# Altium PCB BPS_PCB_v1-0.PcbDoc
Units mil, origin at the board's own origin, x right, y up, seen from the top; angles counter-clockwise.
Board outline 6102.36 x 2834.65 mil, 2 copper layers (Top Layer, Bottom Layer); 29 components, 13 nets, 96 pads, 0 vias.
Unrouted connection lines stored in the file: 82.
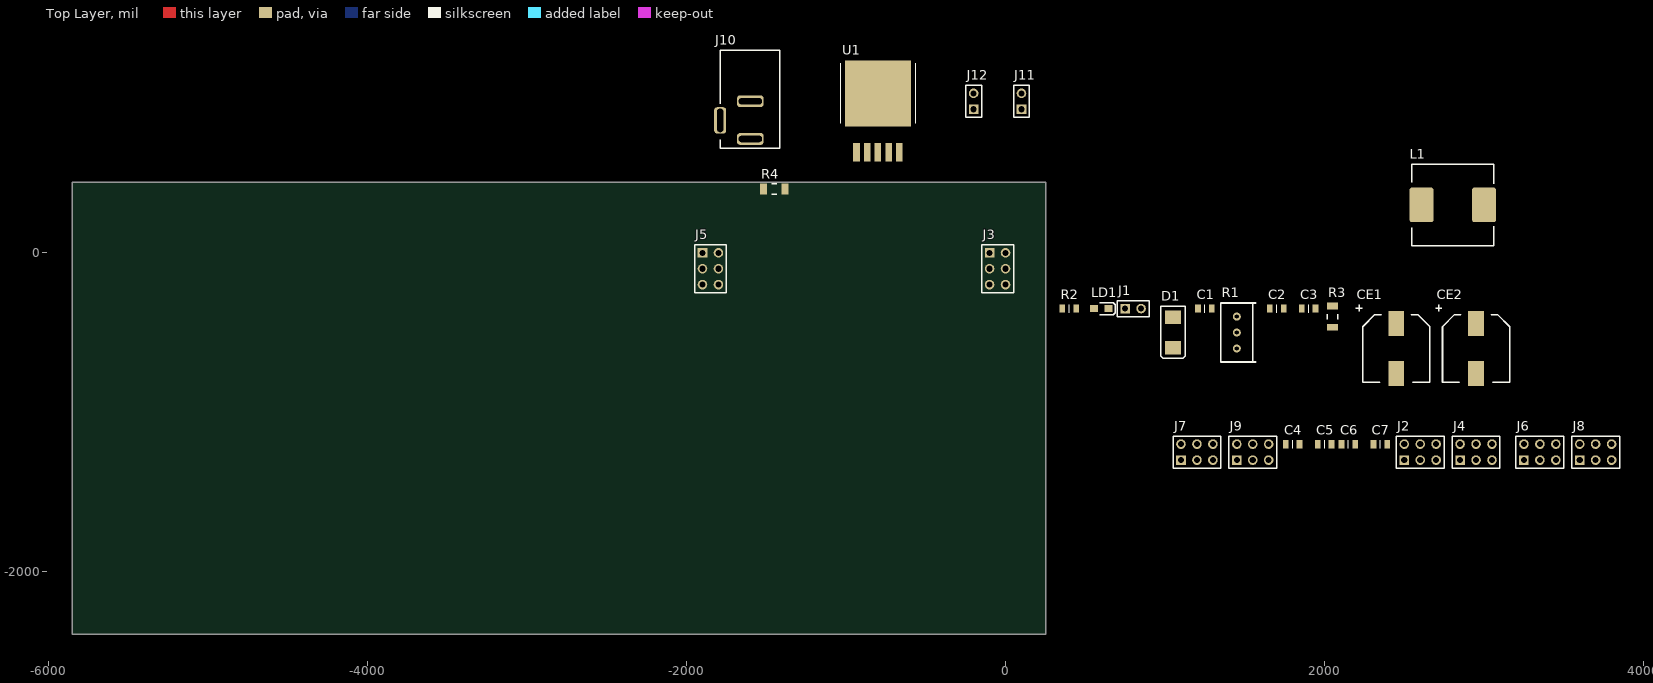
[diagram p0: Top Layer view]
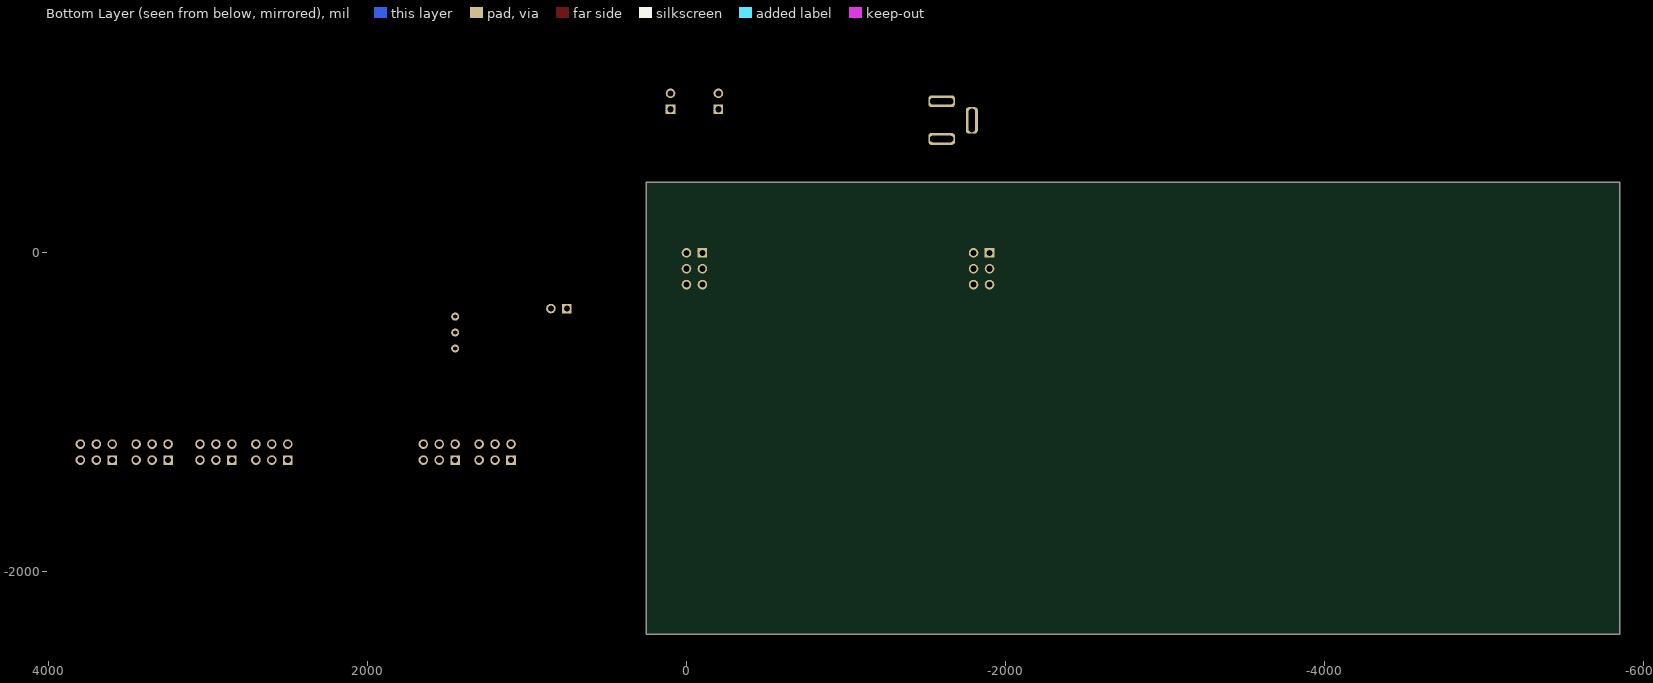
[diagram p1: Bottom Layer view, seen from below]

## Layer stack, top to bottom
Top Solder: solder mask 0.4, Solder Resist, Dk 3.5
Top Layer: signal copper 1.4
Dielectric 1: dielectric 12.6, FR-4, Dk 4.8
Bottom Layer: signal copper 1.4
Bottom Solder: solder mask 0.4, Solder Resist, Dk 3.5

## Board outline
-5850.39,-2391.34 251.97,-2391.34 251.97,443.31 -5850.39,443.31

## Design rules (kind name [scope] priority, off if disabled: settings)
Clearance [All] p1: gap=10 ignorepadtopadclearanceinfootprint=FALSE except(0: Arc-Hole Track-Hole SMDPad-Hole THPad-Hole Via-Hole Fill-Hole Poly-Hole Region-Hole Text-Hole)
PolygonConnect [All] p1: connectstyle=Relief reliefconductorwidth=10 reliefentries=4 polygonreliefangle="90 Angle" airgapwidth=10
RoomDefinition BPS_PowerSupply_v1-0 [InComponentClass('BPS_PowerSupply_v1-0')] p1: confinementstyle=ConfineIn formatcopy=TRUE lockcomponents=FALSE outline -6800,-3350 3800,-3350 3800,1350 -6800,1350
RoomDefinition BPS_PowerOutput_v1-0 [InComponentClass('BPS_PowerOutput_v1-0')] p2: confinementstyle=ConfineIn formatcopy=TRUE lockcomponents=FALSE outline -6850,-3300 3950,-3300 3950,1300 -6850,1300
RoomDefinition BPS_PowerInput_v1-0 [InComponentClass('BPS_PowerInput_v1-0')] p3: confinementstyle=ConfineIn formatcopy=TRUE lockcomponents=FALSE outline -6900,-3250 1450,-3250 1450,1450 -6900,1450
RoutingVias [All] p1: holewidth=28 width=50 viastyle="Through Hole" minholewidth=28 minwidth=50 maxholewidth=28 maxwidth=50
SolderMaskExpansion [All] p1: expansion=4 istentingtop=FALSE
Width [All] p1: maxlimit=10 minlimit=10 preferedwidth=10
30 further rules are at their usual default settings.

## Classes and differential pairs
component class BPS_PowerSupply_v1-0: C1 C2 C3 CE1 CE2 D1 J1 L1 LD1 R1 R2 R3 U1
component class BPS_PowerOutput_v1-0: C4 C5 C6 C7 J2 J3 J4 J5 J6 J7 J8 J9
component class BPS_PowerInput_v1-0: J10 J11 J12 R4

## Components (designator, comment, footprint, x,y, rotation, side; value= is the part's Value field where it differs from the comment)
C1 "WCAP-CSGP (0805)" Cap0805 1250,-350 r0 top value=100nF
C2 "WCAP-CSGP (0805)" Cap0805 1700,-350 r0 top value=3.3nF
C3 "WCAP-CSGP (0805)" Cap0805 1900,-350 r0 top value=100nF
C4 "WCAP-CSGP (0805)" Cap0805 1800,-1200 r0 top value=100nF
C5 "WCAP-CSGP (0805)" Cap0805 2000,-1200 r0 top value=100nF
C6 "WCAP-CSGP (0805)" Cap0805 2150,-1200 r0 top value=100nF
C7 "WCAP-CSGP (0805)" Cap0805 2350,-1200 r0 top value=100nF
CE1 "50V 100uF" 10.0dia(10.0) 2450,-600 r0 top value=100uF
CE2 "35V 220uF" 10.0dia(10.0) 2950,-600 r0 top value=220uF
D1 "SS34" DO-214AA 1050,-500 r90 top
J1 "22-28-4023" CONSIL02STRMALE_100_100 800,-350 r0 top
J2 "10-89-7062" CONDIL06STRMALE_100_100 2600,-1250 r0 top
J3 "10-89-7062" CONDIL06STRMALE_100_100 -50,-100 r270 top
J4 "10-89-7062" CONDIL06STRMALE_100_100 2950,-1250 r0 top
J5 "10-89-7062" CONDIL06STRMALE_100_100 -1850,-100 r270 top
J6 "10-89-7062" CONDIL06STRMALE_100_100 3350,-1250 r0 top
J7 "10-89-7062" CONDIL06STRMALE_100_100 1200,-1250 r0 top
J8 "10-89-7062" CONDIL06STRMALE_100_100 3700,-1250 r0 top
J9 "10-89-7062" CONDIL06STRMALE_100_100 1550,-1250 r0 top
J10 "163-179PH-EX" PowerJack_2.1_5.5 -1600,1253.15 r180 top
J11 "22-28-4023" CONSIL02STRMALE_100_100 100,950 r90 top
J12 "22-28-4023" CONSIL02STRMALE_100_100 -200,950 r90 top
L1 "DR127" DR127 2804.13,300 r0 top value=47.0uH
LD1 "APT2012SGC" LED0805 600,-350 r0 top
R1 "3296W" 3296W 1450,-500 r0 top value=10k
R2 "Chip Resistor" RES0805 400,-350 r0 top value=510R
R3 "Chip Resistor" RES1206 2050,-400 r90 top value=5.1k
R4 "Chip Resistor" RES1206 -1450,400 r180 top value=0R
U1 "LM2596SX-ADJ/NOPB" TO-263-5 -800,872.05 r90 top

## Footprints (in the part's own frame and the unit in brackets; to place one, negate y for a bottom-side part, rotate by r counter-clockwise, add the part's x,y. Pads: shape width x height; smd on the part's side, far side on the other; paste and mask are expansions set on the pad)
10.0dia(10.0) [mm] "Capacitor Eletrolytic (D=10,P=10)"
  rect 2.5x4 smd: 1(0,4) 2(0,-4)
  silkscreen extent -6.44,-5.4 5.35,6.95, body extent -5.25,-6 5.25,6, height 10.5
3296W [mil] "Trimmer Resistors - Through Hole 3/8\" Sealed Vertical Adjust"
  round 50 hole 26: 1(0,100) 2(0,0) 3(0,-100)
  silkscreen extent -100,-185 120,185, body extent -95,-189 95,189, height 458
Cap0805 [mm] "Multilayer Ceramic Capacitors MLCC - SMD/SMT"
  rect 0.9x1.3 smd mask+0.05: 1(-1.1,0) 2(1.1,0)
  silkscreen extent 0,-0.64 0,0.64, body extent -1,-0.62 1,0.63, height 0.78
CONDIL06STRMALE_100_100 [mil] "Headers & Wire Housings 6CKT"
  rect 60x60 hole 38: 1(-100,-50)
  round 60 hole 38: 2(-100,50) 3(0,-50) 4(0,50) 5(100,-50) 6(100,50)
  silkscreen extent -150,-100 150,100, body extent -150,-96 150,96, height 363
CONSIL02STRMALE_100_100 [mil] "Headers & Wire Housings 2CKT"
  rect 60x60 hole 38: 1(-50,0)
  round 60 hole 38: 2(50,0)
  silkscreen extent -100,-50 100,50, body extent -100,-50 100,50, height 363
DO-214AA [mil] "Surface Mount General Rectifier"
  rect 85x100 smd: A(96,0) K(-96,0)
  silkscreen extent -161,-78 165,78, body extent -108,-77 108,77, height 96
DR127 [mm] "High power density, high efficiency, low profile shielded  drum core power inductors"
  rrect20% 3.85x5.5 smd mask+0.203: 1(-4.975,0) 2(4.975,0)
  silkscreen extent -6.5,-6.5 6.5,6.5, body extent -6.25,-6.25 6.25,6.25, height 8
LED0805 [mm] "Chip Led, Body 2.0x1.25mm"
  rect 1.25x1.1 smd mask+0.05: A(-1.175,0) K(1.175,0)
  silkscreen extent -0.25,-0.97 2.26,0.97, body extent -1,-0.62 1,0.63, height 1.12
PowerJack_2.1_5.5 [mm] "DC Power Connectors Power Jack/Connector 2.1mm x 5.5mm"
  rrect50% 4.2x1.9 hole 3.7 slot 1 at 90 deg: 1(0,13.7) 2(0,7.7)
  rrect50% 1.9x4.2 hole 3.7 slot 1 at 0 deg: 3(4.8,10.75)
  silkscreen extent -4.7,-0.4 4.8,15.2, body extent -4.5,-0.3 4.9,14, height 11.1
RES0805 [mm] "Chip Resistor, Body 2.0x1.25mm"
  rect 0.9x1.3 smd mask+0.05: 1(-1.1,0) 2(1.1,0)
  silkscreen extent 0,-0.64 0,0.64, body extent -1.01,-0.63 0.99,0.62, height 0.5
RES1206 [mm] "Chip Resistor, Body 3.2x1.6mm"
  rect 1.1x1.7 smd mask+0.051: 1(-1.7,0) 2(1.7,0)
  silkscreen extent -0.4,-0.8 0.4,0.8, body extent -1.55,-0.77 1.55,0.78, height 0.55
TO-263-5 [mm] "D-PAK/TO-263-5; 5 Leads; Body 14.4 (inc. leads) x 10.4 mm (LxW max)"
  rect 2.95x1.05 smd: 1(-6.15,3.41) 2(-6.15,1.705) 3(-6.15,0) 4(-6.15,-1.705) 5(-6.15,-3.41)
  rect 10.5x10.5 smd: 6(3.25,0)
  silkscreen extent -1.5,-6 8,5.9, body extent -6.73,-5.08 7.29,5.08, height 4.56

## Part data
C1 C2 C3 C4 C5 C6 C7: "Surface Mount Multilayer Ceramic Chip Capacitors  for Commercial Applications", Manufacturer1=Wurth, PartNumber1=EMPTY, Tolerance=20%, Voltage=50V, LatestRevisionDate=19-Jun-2016, PackageDescription="CAP0805;2 Leads", PackageReference=CAP0805, Published=19-Jun-2016, Publisher="Lucas Moraes"
CE1: "Electrolytic Capacitor SMD", Manufacturer1=Nichicon, PartNumber1=UUA1H101MNL1GS, Tolerance=20%, Voltage=50V, Code=101, LatestRevisionDate=05-Sep-2021, LatestRevisionNote=Created, PackageDescription="10.0dia(10.0)2 leads", PackageReference=8.0dia(10.0), Published=05-Sep-2021, Publisher="Lucas Moraes"
CE2: "Electrolytic Capacitor SMD", Manufacturer1=Nichicon, PartNumber1=UUA1V221MNL1GS, Tolerance=20%, Voltage=35V, Code=221, LatestRevisionDate=06-Sep-2021, LatestRevisionNote=Created, PackageDescription="10.0dia(10.0);2 leads", PackageReference=10.0dia(10.0), Published=06-Sep-2021, Publisher="Lucas Moraes"
D1: "Schottky Barrier Rectifiers 40V 3.0A", Manufacturer1="On Semiconductor", If=3.0A, LatestRevisionDate=20-Jun-2016, PackageDescription="DO-214AA; 2 Leads", PackageReference=DO-214AA, PartNumber1=SS34, Published=24-May-2022, Publisher="Lucas Moraes", Vf=0.85V, Vrrm=40V
J1 J11 J12: "Headers & Wire Housings 02 MODII HDR SRST B/A .100CL", Manufacturer1=Molex, Gender=Male, LastRevisionNote=Created, LatestRevisionDate=27-Mar-2023, PackageDescription="CONSIL02STRMALE_100_100; 2 Leads", PackageReference=CONSIL02STRMALE_100_100, PartNumber1=22-28-4023, Pins="2 pins", Pitch=2.54mm, Published=15-Set-2017, Publisher="Lucas Moraes", Type=Pin
J2 J3 J4 J5 J6 J7 J8 J9: "Headers & Wire Housings C-Grid PCB Conn SR V onn SR Vt Tn-A 8Ckt", Manufacturer1=Molex, Direction=180, Gender=Male, LastRevisionNote=Created, LatestRevisionDate=12-Sep-2017, PackageDescription="CONDIL6; 6 Leads", PackageReference=CONDIL6, PartNumber1=10-89-7062, Pins="6 pins", Pitch=2.54mm, Published=12-Sep-2017, Publisher="Douglas Alves", Type=Pin
J10: "DC Power Connectors PCB 2.1MM", Manufacturer1=Kobiconn, Gender=Female, LatestRevisionDate=04-Dec-2022, PackageDescription="PowerJack_2.1_5.5; 3 Leads", PackageReference=PowerJack_2.1_5.5, PartNumber1=163-179PH-EX, Pins="3 pins", Published=04-Dec-2022, Publisher="Lucas Moraes", Type="Power DC"
L1: "High power density, high efficiency, low profile shielded drum core power inductors", Current=2.95A, Manufacturer1="Coiltronics / Eaton", PartNumber1=DR127-470-R, Tolerance=10%, Datasheet=https://br.mouser.com/datasheet/2/87/eaton-dr-high-power-density-high-efficiency-shield-1608690.pdf, LatestRevisionDate=05-Apr-2023, PackageDescription="DR127; 2 Leads", PackageReference=DR127, Published=05-Apr-2023, Publisher="Lucas Moraes"
LD1: "Standard LEDs - SMD 0805 Green", Colour=Green, Manufacturer1=Kingbright, Datasheet=http://www.us.kingbright.com/images/catalog/SPEC/APT2012SGC.pdf, LastRevision=29-Dec-2016, LastRevisionNote=Created, PackageDescription="LED0805; 2 leads", PackageReference=LED0805, PartNumber1=APT2012SGC, Published=29-Dec-2016, Publisher="Lucas Moraes", Vled="2.2 V", Wavelength=568nm
R1: "Trimmer Resistors - Through Hole 3/8\" 100Kohms Sealed Vertical Adjust", Manufacturer1=Bourns, Power=0.4W, Tolerance=5%, LatestRevisionDate=22-May-2017, PackageDescription="3386F; 3 Leads", PackageReference=3296W, PartNumber1=3296W, Published=22-May-2017, Publisher="Lucas Moraes"
R2: library part CRCW0805, "Thick Film Chip Resistors with CECC Approval,  available with Established Reliability", PartNumber1=CRCW0805(RRRR)(T)(C)(PP)(SS), Power=0.125W, Tolerance=5%, LatestRevisionDate=06-May-2016, PackageDescription="SMD 0805; 2 Leads", PackageReference=0805, Published=06-May-2016, Publisher="Lucas Moraes"
R3: library part CRCW1206, "Thick Film Chip Resistors with CECC Approval,  available with Established Reliability", PartNumber1=CRCW12065K10JNEA, Power=0.25W, Tolerance=5%, LatestRevisionDate=06-May-2016, PackageDescription="SMD 1206; 2 Leads", PackageReference=1206, Published=06-May-2016, Publisher="Lucas Moraes"
R4: library part CRCW1206, "Thick Film Chip Resistors with CECC Approval,  available with Established Reliability", PartNumber1=CRCW12060000JNEA, Power=0.25W, Tolerance=5%, LatestRevisionDate=06-May-2016, PackageDescription="SMD 1206; 2 Leads", PackageReference=1206, Published=06-May-2016, Publisher="Lucas Moraes"
U1: "Switching Voltage Regulators 4V to 40V, 3A Step-Up Wide Vin Flyback Regulator 5-DDPAK/TO-263 -40 to 125", Current=3A, Manufacturer1="Texas Instruments", Voltage=ADJ, LatestRevisionDate=09-Agu-2022, LatestRevisionNote=Created, PackageDescription="TO-263-5;5 Leads", PackageReference=TO-263-5, PartNumber1=LM2596SX-ADJ/NOPB, Published=09-Agu-2022, Publisher="Lucas Moraes"

## Nets (pads, with @x,y where several pads share a name; then routed paths per layer and width w, separated by ;. In a path a pad name is that pad's centre, name@x,y a point inside that pad or via, vN(x,y) a via of type N, cw(c..) or ccw(c..) an arc to the next point about the centre after c; other vN are vias at no path point)
GND: C1.2 C3.2 C4.2 C5.2 C6.2 C7.2 CE1.2 CE2.2 D1.A J1.2 J3.2 J3.4 J3.6 J5.2 J5.4 J5.6 J7.2 J7.4 J7.6 J9.2 J9.4 J9.6 J10.2 J12.1 J12.2 LD1.K R2.1 U1.3 U1.6
NetC2_2: C2.2 R1.1 R2.2 U1.4
NetC4_1: C4.1 J2.2 J2.4 J2.6 J3.1 J3.3 J3.5
NetC5_1: C5.1 J4.2 J4.4 J4.6 J5.1 J5.3 J5.5
NetC6_1: C6.1 J6.2 J6.4 J6.6 J7.1 J7.3 J7.5
NetC7_1: C7.1 J8.2 J8.4 J8.6 J9.1 J9.3 J9.5
NetD1_K: D1.K L1.1 U1.2
NetJ1_1: J1.1 U1.5
NetJ10_1: J10.1 R4.2
NetLD1_A: LD1.A R3.1
PS01: C2.1 C3.1 CE2.1 J2.1 J4.1 J6.1 J8.1 L1.2 R1.2 R1.3 R3.2
PS02: J2.5 J4.5 J6.5 J8.5 J11.1 J11.2
VIN: C1.1 CE1.1 J2.3 J4.3 J6.3 J8.3 R4.1 U1.1
pads on no net: J10.3

## Silkscreen, mask and mechanical layers (free items; w line width, h text height)
Board:
  the board outline again, w10
Mechanical Test:
  circle w10: c-1790,0 r19.68
  circle w10: c-1890,0 r19.68
  circle w10: c-100,0 r19.68
  circle w10: c0,0 r19.68